# Altium PCB sheet_buck.PcbDoc
Units mm, origin at the board's own origin, x right, y up, seen from the top; angles counter-clockwise.
Board outline 152.4 x 101.6 mm, 2 copper layers (Top Layer, Bottom Layer); 20 components, 11 nets, 36 pads, 0 vias.
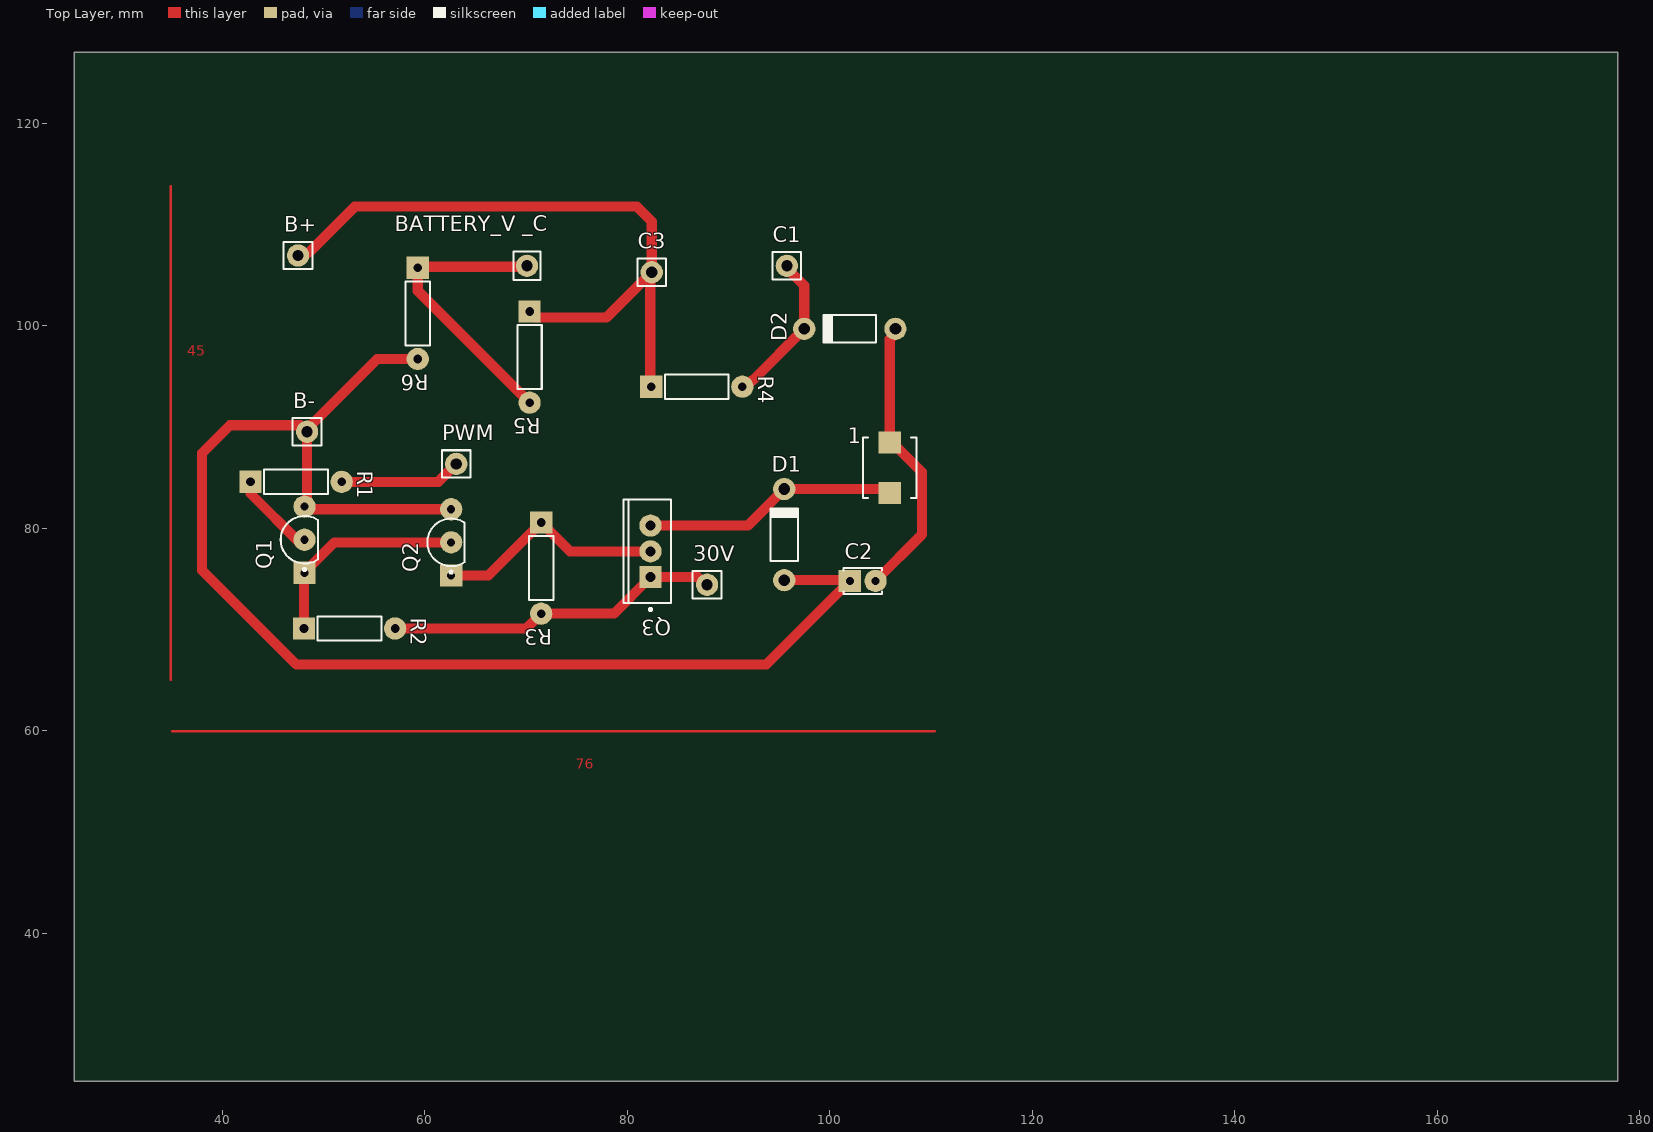
[diagram p0: Top Layer view]
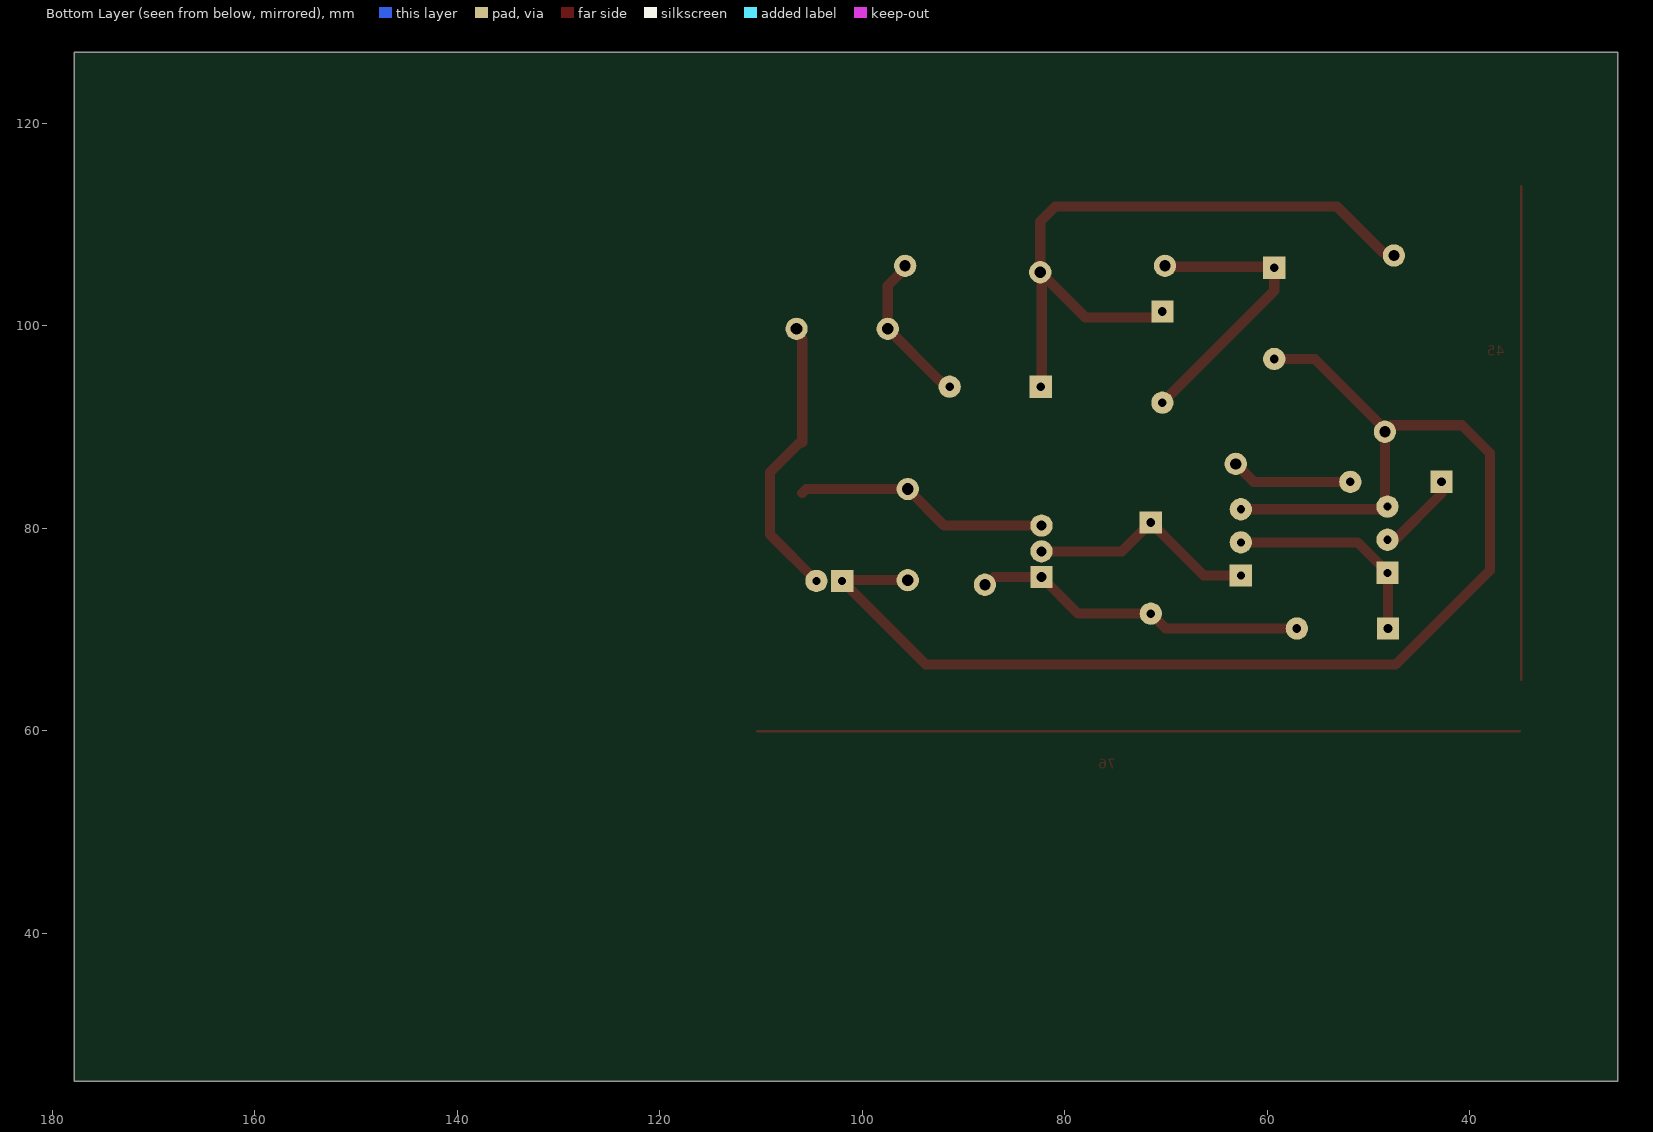
[diagram p1: Bottom Layer view, seen from below]

## Layer stack, top to bottom
Top Solder: solder mask 0.0102, Solder Resist, Dk 3.5
Top Layer: signal copper 0.0356
Dielectric 1: dielectric 0.32, FR-4, Dk 4.8
Bottom Layer: signal copper 0.0356
Bottom Solder: solder mask 0.0102, Solder Resist, Dk 3.5

## Board outline
25.4,25.4 177.8,25.4 177.8,127 25.4,127

## Design rules (kind name [scope] priority, off if disabled: settings)
Clearance [All] p1: gap=0.254 ignorepadtopadclearanceinfootprint=FALSE except(0: Arc-Hole Track-Hole SMDPad-Hole THPad-Hole Via-Hole Fill-Hole Poly-Hole Region-Hole Text-Hole)
PolygonConnect [All] p1: connectstyle=Relief reliefconductorwidth=0.254 reliefentries=4 polygonreliefangle="90 Angle" airgapwidth=0.254
RoutingVias [All] p1: holewidth=0.711 width=1.27 viastyle="Through Hole" minholewidth=0.711 minwidth=1.27 maxholewidth=0.711 maxwidth=1.27
SolderMaskExpansion [All] p1: expansion=0.102 istentingtop=FALSE
Width [All] p1: maxlimit=1 minlimit=0.254 preferedwidth=1
30 further rules are at their usual default settings.

## Components (designator, comment, footprint, x,y, rotation, side; value= is the part's Value field where it differs from the comment)
1 "LQH55DN100M03L" FP-LQH55DN_03-MFG 105.918,85.979 r90 top
30V "61300111121" 61300111121 87.884,74.422 r0 top
B+ "61300111121" 61300111121 47.498,106.934 r0 top
B- "61300111121" 61300111121 48.387,89.535 r0 top
"BATTERY_V _C" "61300111121" 61300111121 70.104,105.918 r90 top
C1 "61300111121" 61300111121 95.758,105.918 r0 top
C2 "150UF" KEMT-C315-THT-2 103.251,74.803 r0 top
C3 "61300111121" 61300111121 82.423,105.283 r0 top
D1 "1N4728A" FAIR-DO-41-2_V 95.504,79.375 r90 top
D2 "1N4728A" FAIR-DO-41-2_V 101.981,99.695 r180 top
PWM "61300111121" 61300111121 63.119,86.36 r0 top
Q1 "BC547B" ONSC-TO-92-3-29-11 48.133,78.867 r90 top
Q2 "BC547B" ONSC-TO-92-3-29-11 62.611,78.613 r90 top
Q3 "IRF 530N" FAIR-TO-220-3 82.296,77.724 r180 top
R1 "1K" RESA60-630X240 47.299,84.582 r0 top
R2 "1K" RESA60-630X240 52.578,70.104 r0 top
R3 "1K" RESA60-630X240 71.501,76.073 r270 top
R4 "1" RESA60-630X240 86.868,93.98 r0 top
R5 "22K" RESA60-630X240 70.358,96.901 r270 top
R6 "10K" RESA60-630X240 59.309,101.219 r270 top

## Footprints (in the part's own frame and the unit in brackets; to place one, negate y for a bottom-side part, rotate by r counter-clockwise, add the part's x,y. Pads: shape width x height; smd on the part's side, far side on the other; paste and mask are expansions set on the pad)
61300111121 [mm] "Pin Header, pitch 2.54 mm, THT, Vertical, single row, 1p"
  round 2.2 hole 1.1: 1(0,0)
  silkscreen extent -1.42,-1.34 1.42,1.34, body extent -1.27,-1.27 1.27,1.27, height 8.57
FAIR-DO-41-2_V [mm] "2-Leads, Axial leaded, Body 2.72x5.2mm, Pin Spacing 9mm"
  round 2.2 hole 1.15: 1(-4.5,0) 2(4.5,0)
  silkscreen extent -2.6,-1.36 2.6,1.36, body extent -4.93,-1.36 4.93,1.36, height 2.71
FAIR-TO-220-3 [mm] "FM, 3-Leads, Body 10.2x4.7mm, Pitch 2.54mm"
  rect 2.2x2.2 hole 1: 1(0,2.54)
  round 2.2 hole 1: 2(0,0) 3(0,-2.54)
  silkscreen extent -2.04,-5.1 2.66,5.87, body extent -2.04,-5.1 2.66,5.1, height 18.95
FP-LQH55DN_03-MFG [mm]
  rect 2.2x2.2 smd paste+0 mask+0: 1(-2.5,0) 2(2.5,0)
  silkscreen extent -3,-2.65 3,2.65, body extent -4.1,-2.75 4.1,2.75, height 0.25
KEMT-C315-THT-2 [mm] "THD, 2-Leads, Body 3.81x2.54mm"
  rect 2.2x2.2 hole 0.8: 1(-1.27,0)
  round 2.2 hole 0.8: 2(1.27,0)
  silkscreen extent -1.91,-1.27 1.91,1.27, body extent -1.91,-1.27 1.91,1.27, height 4.66
ONSC-TO-92-3-29-11 [mm] "TO, 3-Leads, Body Dia 4.7mm, Pitch 1.27mm"
  rect 2.2x2.2 hole 0.8: 1(-3.27,0)
  round 2.2 hole 0.8: 2(0,0) 3(3.27,0)
  silkscreen extent -3.07,-1.34 2.35,2.35, body extent -2.35,-1.33 2.36,2.36, height 7.87
RESA60-630X240 [mm] "Axial Resistor, 2-Leads, Dia 2.4mm, Body Length 6.3mm"
  rect 2.2x2.2 hole 0.85: 1(-4.5,0)
  round 2.2 hole 0.85: 2(4.5,0)
  silkscreen extent -3.15,-1.2 3.15,1.2, body extent -3.15,-1.2 3.15,1.2, height 2.4

## Part data
1: library part CMP-2000-06586-2, "FIXED IND 10UH 1.7A 93 MOHM SMD", Case Code (Imperial)=2220, Case Code (Metric)=5750, Current Rating=1.7A, DC Resistance (DCR)=93mR, Inductance=10uH, Inductance Tolerance=20%, Max Operating Temperature=80°C, Min Operating Temperature=-40°C, Package Quantity=350, Resistor Type=Wirewound, Self Resonant Frequency=20MHz, Test Frequency=1MHz, Case/Package=2220, Core Material=Ferrite, DC Current=1.7A, Depth=5.3mm, Height=4.7mm, Height - Seated (Max)=0.197inch, Lead Free="Lead Free", Length=5.7mm, Max DC Current=1.7A, Military Standard=Not, Mount="Surface Mount", Packaging="Tape and Reel", Radiation Hardening=No, REACH SVHC="No SVHC", Series Resistance=93mR, Shielding=Unshielded, Termination=SMD/SMT, Tolerance=20%, Weight=0.016932oz, Width=0.197inch
30V B+ B- "BATTERY_V _C" C1 C3 PWM: library part CMP-1502-01058-1, "THT Vertical Pin Header WR-PHD, Pitch 2.54 mm, Single Row, 1 pins", Contact Resistance=20mOhm, Manufacturer="Wurth Elektronik", Operating Temperature=-40to105degC, Rated Current=3A, Withstanding Voltage=500VAC, Working Voltage=250VAC, Datasheet URL=https://katalog.we-online.de/em/datasheet/6130xx11121.pdf, Gender=Male, Manufacturer URL=http://www.we-online.de, Mounting Technology=THT, Orientation=Vertical, Package Reference=61300111121, Packaging=Bag, Part Number=61300111121, Pin Number=1, Pitch=2.54mm, Publisher=WurthElektronik, Row Number=Single
C2: library part CMP-1664-00007-1, "Capacitor, Ceramic, 0.01 uF, +/- 10%, 100 V, X7R, -55 to 125 degC, 2-Pin THD, RoHS, Bulk", Case\Package=PDIP, Forward Current="60 mA", Forward Voltage="1.5 V", Max Operating Temperature="100 degC", Max Power Dissipation="400 mW", Min Operating Temperature="-55 degC", Output Voltage="70 V", Package Quantity=2000, Channels=2, ComponentLink1Description="Manufacturer URL", ComponentLink1URL=http://www.kemet.com/, ComponentLink2Description=Datasheet, ComponentLink2URL=http://capacitoredge.kemet.com/capedge2/DataSheet/Datasheet-C315C103K1R5TA.pdf?pn=C315C103K1R5TA{BULK}, DatasheetVersion=Aug-16, Mount="Through Hole", Nominal Vf="1.3 V", PackageDescription="2-Pin Through Hole Device, Body 3.81 x 2.54 mm", PackageReference=C315-THT-2, Packaging=Rail/Tube, Pins=16, Radiation Hardening=No, REACH SVHC=Unknown, RoHSCompliant=true, Vce Max="500 mV"
D1 D2: library part CMP-0892-00028-1, "Zener Diode, 3.3V, 1W, 5%, -65 to 200 degC, 2-Pin DO-41, Body 2.72 x 5.2 mm, RoHS", Manufacturer="Fairchild Semiconductor", Operating and Storage Temperature Range="-65 to 200 degC", Test Current IZ (mA)=76, Tolerance=5%, ComponentLink1Description="Manufacturer URL", ComponentLink1URL=http://www.fairchildsemi.com/, ComponentLink2Description=Datasheet, ComponentLink2URL=http://www.fairchildsemi.com/ds/1N/1N4744A.pdf, ComponentLink3Description="Package Specification", ComponentLink3URL=http://www.fairchildsemi.com/dwg/DO/DO41A.pdf, DatasheetVersion="Rev. H3", IR (uA)=100, Mounting Technology="Through Hole", PackageDescription="2-Pin Axial leaded, Body 2.72 x 5.2 mm, Lead Spread 25.4 mm", PackageReference=DO-41-2, PackageVersion="Rev. 2", PartNumber=1N4728A, PD (W)=1, RoHS=TRUE, VZ (Max.) (V)=3.465, VZ (Min.) (V)=3.135, ZZ (Max) (ohm)=10
Q1 Q2: library part CMP-1048-01467-1, "Amplifier Transistor, NPN Silicon, 3-Pin TO-92, Bulk Box", Manufacturer="On Semiconductor", ComponentLink1Description="Manufacturer URL", ComponentLink1URL=http://www.onsemi.com/, ComponentLink2Description=Datasheet, ComponentLink2URL=http://www.onsemi.com/pub_link/Collateral/BC546-D.PDF, ComponentLink3Description="Package Specification", ComponentLink3URL=http://www.onsemi.cn/pub_link/Collateral/2N6426-D.PDF, DatasheetVersion="Rev. 7", fT Min (MHz)=150, IC Continuous (A)=0.1, Mounting Technology="Through Hole", PackageDescription="3-Pin Transistor Outline, Body 4.825 x 3.685 mm, Pitch 1.27 mm", PackageReference=TO-92-3-29-11_AM_SL, PackageVersion="Rev. AM", Packing="Bulk Box", PartNumber=BC547B, Polarity=NPN, RoHS=FALSE
Q3: library part CMP-2000-04938-1, "Positive Voltage Regulator, 5 V, 1 A, -40 to 125 degC, 3-Pin TO-220, RoHS, Tube", Manufacturer=FairchildSemiconductor, Maximum Input Voltage=35V, Maximum Output Current=2.2(Typ)A, Maximum Quiescent Current=8mA, Operating Temperature=-40to125degC, Output Voltage=5V, Package=3TO-220AB, Package Description="3-Pin Through Hole Device, Body 10 x 4.5 mm, Pitch 2.54 mm", Package Reference=TO-220, Typical Dropout Voltage @ Current=2@1AV, Accuracy=±4%, Category=LinearRegulator, Datasheet URL=https://datasheet.ciiva.com/26904/lm7805ct-26904988.pdf, Datasheet Version=Aug-12, Line Regulation=100mV, Load Regulation=100mV, Manufacturer URL=https://www.fairchildsemi.com/, Mounting=ThroughHole, Number of Outputs=1, Output Type=Fixed, Package URL=https://www.fairchildsemi.com/package-drawings/TO/TO220B03.pdf, Packaging=Rail/Tube, Polarity=Positive, Rad Hard=No, Type=Linear
R1 R2 R3 R4 R5 R6: library part CMP-1659-00075-1, "Axial Resistor, 1 KOhm, +/- 1%, 250 mW, -55 to 155 degC, 2-Pin THD, RoHS, Bulk", Case\Package=Axial, Max Operating Temperature="155 degC", Min Operating Temperature="-55 degC", Package Quantity=200, Power Rating="250 mW", Resistance="10 kohm", Tolerance=1%, Voltage Rating="250 V", ComponentLink1Description="Manufacturer URL", ComponentLink1URL=http://www.yageo.com/, ComponentLink2Description=Datasheet, ComponentLink2URL=http://www.yageo.com/documents/recent/Yageo%20LR_MFR_2013.pdf, DatasheetVersion=Apr-13, Length="0.248 inch", PackageDescription="2-Pin Axial Lead, Dia 2.4 mm, Body Length 6.3 mm", PackageReference=MFR-25, Packaging=Bulk, RoHSCompliant=true

## Nets (pads, with @x,y where several pads share a name; then routed paths per layer and width w, separated by ;. In a path a pad name is that pad's centre, name@x,y a point inside that pad or via, vN(x,y) a via of type N, cw(c..) or ccw(c..) an arc to the next point about the centre after c; other vN are vias at no path point)
+30: 30V.1 Q3.1 R2.2 R3.2 | length 33.2
  Top Layer w1: R2.2 70.032,70.104 R3.2 78.685,71.573 Q3.1 86.976,75.184 87.738,74.422 30V.1
GND: B-.1 C2.1 D1.1 Q1.3 Q2.3 R6.2 | length 137.3
  Top Layer w1: Q1.3 48.348,82.137 48.602,81.883 Q2.3 ; Q1.3@48.387,82.137 B-.1 ; R6.2 55.317,96.719 48.387,89.789 B-.1 ; D1.1 101.909,74.875 C2.1 ; C2.1@102.108,74.93 C2.1 ; B-.1 47.752,90.17 40.767,90.17 38.014,87.417 38.014,75.86 47.326,66.548 93.726,66.548 C2.1
Net1_1: 1.1 D1.2 Q3.3 | length 25.3
  Top Layer w1: Q3.3 91.893,80.264 D1.2 105.522,83.875 1.1
Net1_2: 1.2 C2.2 D2.1 | length 28.5
  Top Layer w1: C2.2 109.093,79.375 109.093,85.554 106.168,88.479 1.2 105.918,98.679 D2.1@106.807,99.568
NetB+_1: B+.1 C3.1 R4.1 R5.1 | length 67.9
  Top Layer w1: B+.1 47.728,107.164 48.49,107.164 53.086,111.76 80.954,111.76 82.423,110.291 C3.1 C3.1@82.268,105.128 ; R5.1 70.958,100.801 77.941,100.801 C3.1@82.268,105.128 ; R4.1@82.268,93.98 C3.1@82.268,105.128
"NetBATTERY_V _C_1": "BATTERY_V _C.1" R5.2 R6.1 | length 28.8
  Top Layer w1: 70.104,105.918 70.004,105.818 59.409,105.818 R6.1 59.309,103.45 R5.2
NetC1_1: C1.1 D2.2 R4.2 | length 15.6
  Top Layer w1: R4.2@91.318,93.605 92.293,94.58 92.366,94.58 D2.2 97.481,103.964 95.758,105.687 C1.1
NetPWM_1: PWM.1 R1.2 | length 12.1
  Top Layer w1: R1.2 61.341,84.582 PWM.1
NetQ1_1: Q1.1 Q2.2 R2.1 | length 21.3
  Top Layer w1: R2.1 48.078,75.597 Q1.1 48.531,75.995 48.531,76.05 51.094,78.613 Q2.2
NetQ1_2: Q1.2 R1.1 | length 8.6
  Top Layer w1: R1.1 42.799,83.439 47.625,78.613 47.879,78.613 Q1.2
NetQ2_1: Q2.1 Q3.2 R3.1 | length 23
  Top Layer w1: Q2.1 66.271,75.343 R3.1 74.35,77.724 Q3.2
copper on no net: | length 124.1
  Top Layer w0.254: 34.925,65.024 34.925,113.792 ; 35.052,59.944 110.363,59.944

## Other copper
Top Layer:
  text "45" at 36.576,97.028 h1
  text "76" at 74.93,56.261 h1